# Altium PCB GreenHouseController.PcbDoc
Units mil, origin at the board's own origin, x right, y up, seen from the top; angles counter-clockwise.
Board outline 6000 x 4000 mil, 2 copper layers (Top Layer, Bottom Layer); 72 components, 50 nets, 229 pads, 0 vias.
Unrouted connection lines stored in the file: 146.
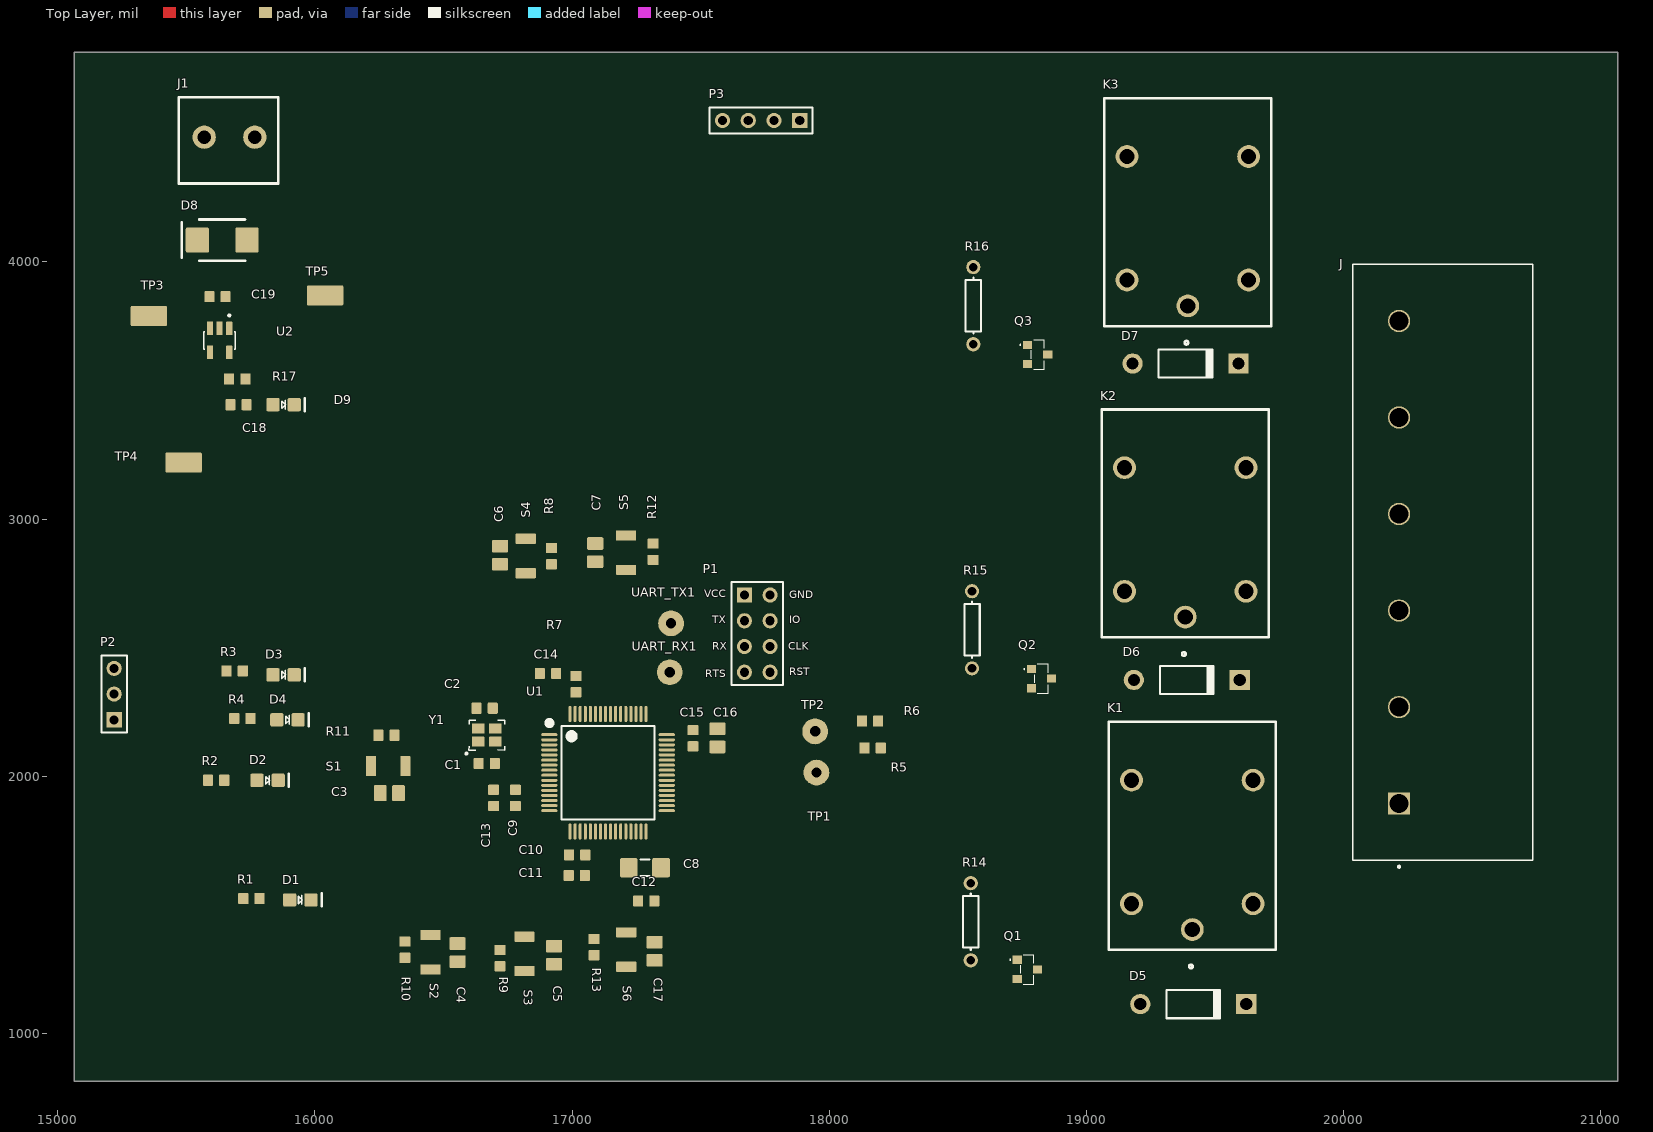
[diagram p0: Top Layer view]
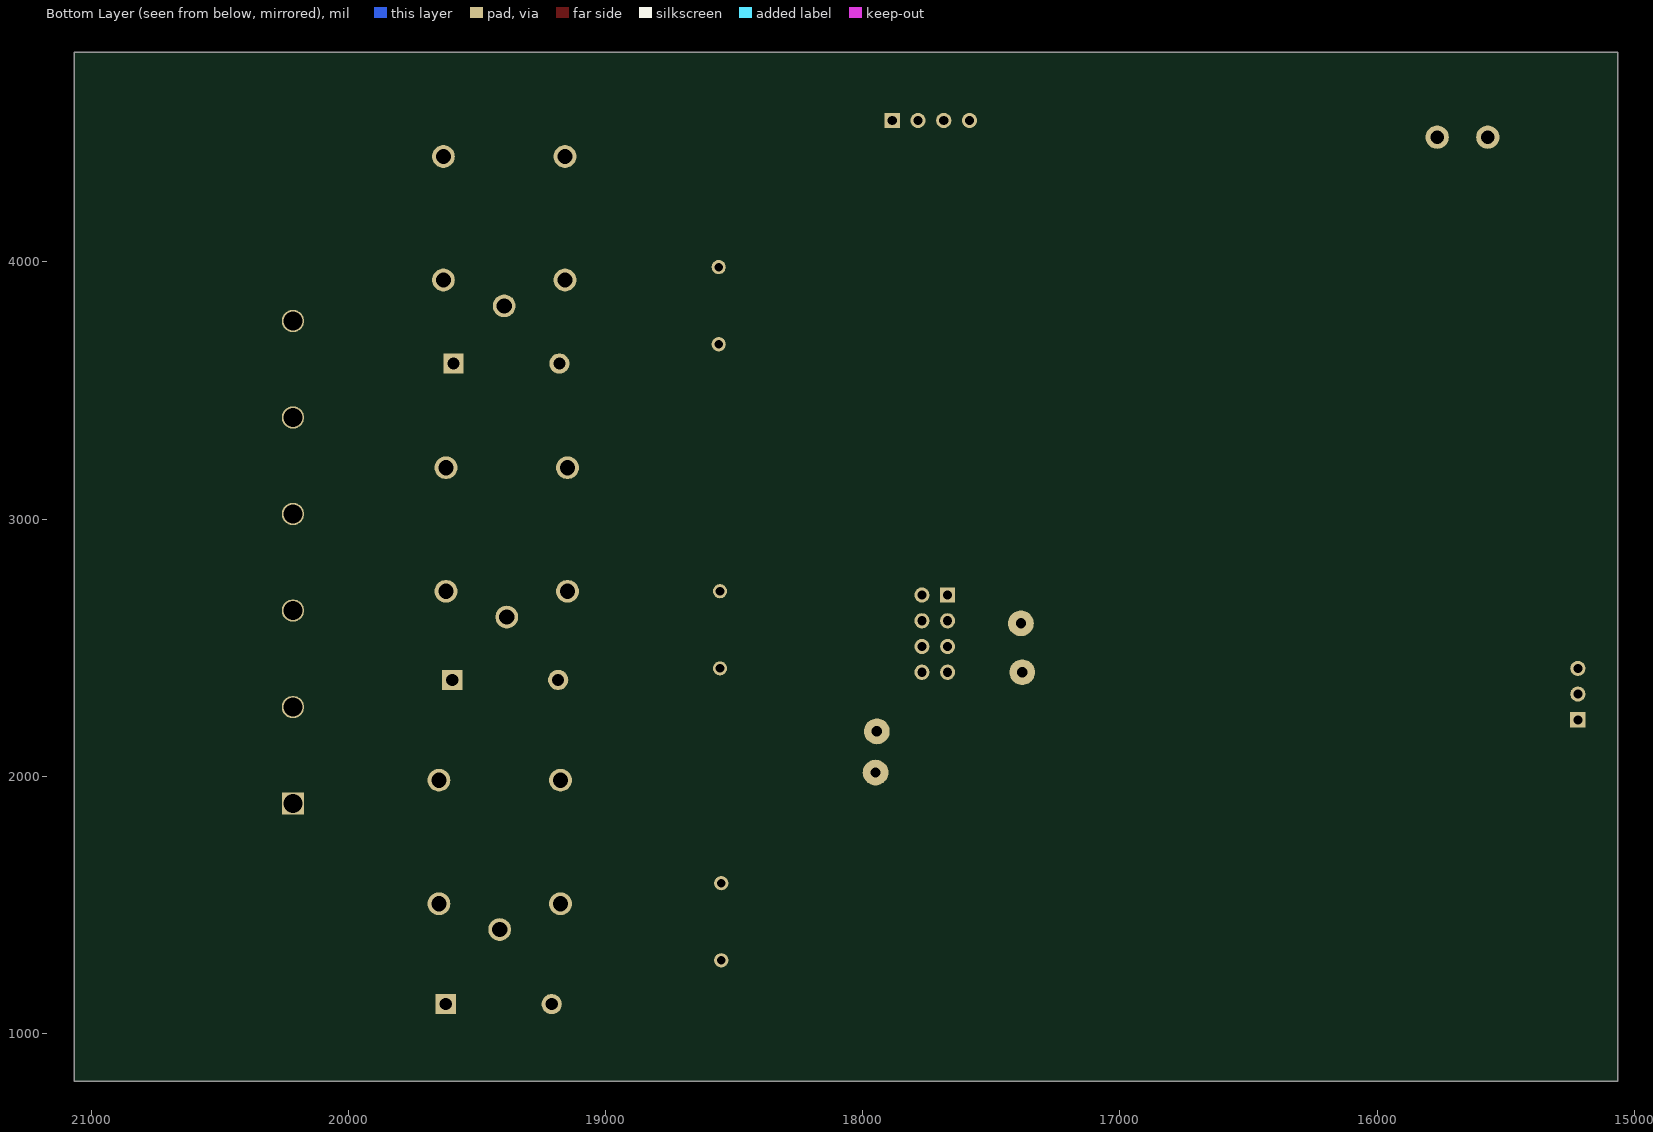
[diagram p1: Bottom Layer view, seen from below]

## Layer stack, top to bottom
Top Solder: solder mask 0.4, Solder Resist, Dk 3.5
Top Layer: signal copper 1.4
Dielectric 1: dielectric 12.6, FR-4, Dk 4.8
Bottom Layer: signal copper 1.4
Bottom Solder: solder mask 0.4, Solder Resist, Dk 3.5

## Board outline
15065,815 21065,815 21065,4815 15065,4815

## Design rules (kind name [scope] priority, off if disabled: settings)
Clearance [All] p1: gap=10 ignorepadtopadclearanceinfootprint=FALSE except(0: Arc-Hole Track-Hole SMDPad-Hole THPad-Hole Via-Hole Fill-Hole Poly-Hole Region-Hole Text-Hole)
PolygonConnect [All] p1: connectstyle=Relief reliefconductorwidth=10 reliefentries=4 polygonreliefangle="90 Angle" airgapwidth=10
RoomDefinition peripherals [InComponentClass('peripherals')] p1: confinementstyle=ConfineIn formatcopy=TRUE lockcomponents=FALSE outline 0,0 2000,0 2000,1000 0,1000
RoomDefinition MCU [InComponentClass('MCU')] p2: confinementstyle=ConfineIn formatcopy=TRUE lockcomponents=FALSE outline 0,0 2000,0 2000,1000 0,1000
RoutingVias [All] p1: holewidth=28 width=50 viastyle="Through Hole" minholewidth=28 minwidth=50 maxholewidth=28 maxwidth=50
SolderMaskExpansion [All] p1: expansion=4 istentingtop=FALSE
Width [All] p1: maxlimit=10 minlimit=10 preferedwidth=10
30 further rules are at their usual default settings.

## Classes and differential pairs
component class PowerAndServo: C18 C19 D8 D9 J1 P2 P3 R17 TP3 TP4 TP5 U2
component class peripherals: D5 D6 D7 J K1 K2 K3 Q1 Q2 Q3 R14 R15 R16
component class MCU: C1 C2 C3 C4 C5 C6 C7 C8 C9 C10 C11 C12 C13 C14 C15 C16 C17 D1 D2 D3 D4 P1 R1 R2 R3 R4 R5 R6 R7 R8 R9 R10 R11 R12 R13 S1 S2 S3 S4 S5 S6 TP1 TP2 U1 UART_RX1 UART_TX1 Y1

## Components (designator, comment, footprint, x,y, rotation, side; value= is the part's Value field where it differs from the comment)
C1 "CAP_14pF_50V_0603" CAP0603 16668.5,2050 r180 top value=14pF
C2 "50v" CAP0603 16660,2265 r0 top value=14pF
C3 "CAP_1uF_16V_0805" CAP2012 16290,1935 r0 top value=1μF
C4 "CAP_1uF_16V_0805" CAP2012 16555,1315 r90 top value=1μF
C5 "CAP_1uF_16V_0805" CAP2012 16930,1305 r90 top value=1μF
C6 "CAP_1uF_16V_0805" CAP2012 16720,2860 r270 top value=1μF
C7 "CAP_1uF_16V_0805" CAP2012 17090,2870 r270 top value=1μF
C8 "CAP_4.7uF_50V_1206" CAP1206 17282.99,1645 r180 top
C9 "CAP_0.1uF_16V_0603" CAP0603 16780,1916.5 r270 top value=0.1μF
C10 "CAP_1uF_16V_0603" CAP0603 17020,1695 r0 top value=1μF
C11 "CAP_0.1uF_16V_0603" CAP0603 17018.5,1615 r0 top value=0.1μF
C12 "CAP_0.1uF_16V_0603" CAP0603 17288.5,1515.65 r0 top value=0.1μF
C13 "CAP_0.1uF_16V_0603" CAP0603 16695,1916.5 r270 top value=0.1μF
C14 "CAP_0.1uF_16V_0603" CAP0603 16906.5,2400 r180 top value=0.1μF
C15 "CAP_4.7uF_16V_0603" CAP0603 17470,2148.5 r90 top value=4.7μF
C16 "CAP_10nF_16V_0805" CAP2012 17565,2149.76 r90 top
C17 "CAP_1uF_16V_0805" CAP2012 17320.65,1320.24 r90 top value=1μF
C18 "CAP_1uF_50V_0603" CAP0603 15703.5,3445 r180 top value=1μF
C19 "CAP_1uF_50V_0603" CAP0603 15621.5,3865 r180 top value=1μF
D1 "LED_GREEN" LED_0805_GREEN 15943.66,1520 r0 top
D2 "LED_GREEN" LED_0805_GREEN 15816.34,1985 r0 top
D3 "LED_GREEN" LED_0805_GREEN 15878.66,2395 r0 top
D4 "LED_GREEN" LED_0805_GREEN 15893.66,2220 r0 top
D5 "Diode 1N4007" DO-41 19415,1115 r0 top
D6 "Diode 1N4007" DO-41 19390,2375 r0 top
D7 "Diode 1N4007" DO-41 19385,3605 r0 top
D8 "TVS_DIODE_UNIDIR_5V" SMBJ5.0A 15640,4085 r0 top
D9 "DIO_LED_G" LED_0805_GREEN 15878.66,3445 r0 top
J "6PCV-06-006" TE_9-1437652-5 20215,1894.41 r90 top
J1 "CON_2M_TERM" 1935161 15668.43,4485 r0 top
K1 "G5LE-14_DC5" G5LE-1A 19736.02,1325.87 r90 top
K2 "G5LE-14_DC5" G5LE-1A 19708.58,2540.55 r90 top
K3 "G5LE-14_DC5" G5LE-1A 19718.58,3750.55 r90 top
P1 "HEADER 4X2" HEADER_2X4 17670,2705 r270 top
P2 "Header 3" HDR1X3 15220,2220 r90 top
P3 "Header 4" HDR1X4 17885,4550 r180 top
Q1 "MMBT3904-TP" SI2305TP 18770,1250 r270 top
Q2 "MMBT3904-TP" SI2305TP 18825,2380 r270 top
Q3 "MMBT3904-TP" SI2305TP 18810,3640 r270 top
R1 "RES_120Ω_0603_5%" RESC0603 15722.01,1525 r0 top value=120Ω
R2 "RES_120Ω_0603_5%" RESC0603 15585,1985 r0 top value=120Ω
R3 "RES_120Ω_0603_5%" RESC0603 15657.01,2410 r0 top value=120Ω
R4 "RES_120Ω_0603_5%" RESC0603 15687.01,2225 r0 top value=120Ω
R5 "RES_1kΩ_0603_5%" RESC0603 18137.01,2110 r0 top value=1kΩ
R6 "RES_1kΩ_0603_5%" RESC0603 18127.01,2215 r0 top value=1kΩ
R7 "RES_1kΩ_0603_5%" RESC0603 17015,2327.01 r90 top value=1kΩ
R8 "RES_10kΩ_0603_5%" RESC0603 16920,2825 r90 top value=10kΩ
R9 "RES_10kΩ_0603_5%" RESC0603 16720,1325 r270 top value=10kΩ
R10 "RES_10kΩ_0603_5%" RESC0603 16350,1357.99 r270 top value=10kΩ
R11 "RES_10kΩ_0603_5%" RESC0603 16310,2160 r180 top value=10kΩ
R12 "RES_10kΩ_0603_5%" RESC0603 17315,2842.01 r90 top value=10kΩ
R13 "RES_10kΩ_0603_5%" RESC0603 17085.65,1367.99 r270 top value=10kΩ
R14 "Res1" AXIAL-0.3 18550,1435 r270 top value=1K
R15 "Res1" AXIAL-0.3 18555,2570 r270 top value=1K
R16 "Res1" AXIAL-0.3 18560,3830 r270 top value=1K
R17 "RES_120Ω_0603_5%_HP" RESC0603 15730,3545 r180 top
S1 "SW_TACTILE" B3U-1000P 16285,2040 r180 top
S2 "SW_TACTILE" B3U-1000P 16450,1316.93 r270 top
S3 "SW_TACTILE" B3U-1000P 16815,1310 r270 top
S4 "SW_TACTILE" B3U-1000P 16820,2856.93 r90 top
S5 "SW_TACTILE" B3U-1000P 17210,2870 r90 top
S6 "SW_TACTILE" B3U-1000P 17210.65,1326.93 r270 top
TP1 "TESTPOINT_LOOP" TESTPOINT_LOOP 17950,2015 r0 top
TP2 "TESTPOINT_LOOP" TESTPOINT_LOOP 17945,2175 r0 top
TP3 "TESTPOINT_SMD_LOOP" S1751-46R 15355,3790 r0 top
TP4 "TESTPOINT_SMD_LOOP" S1751-46R 15490,3220 r0 top
TP5 "TESTPOINT_SMD_LOOP" S1751-46R 16040,3870 r0 top
U1 "STM32F446RET6" STM-LQFP64_L 17140,2014.43 r0 top
U2 "LDO_3.3V_600mA" SOT95P285X140-5N 15630,3695 r270 top
UART_RX1 "TESTPOINT_LOOP" TESTPOINT_LOOP 17380,2405 r90 top
UART_TX1 "TESTPOINT_LOOP" TESTPOINT_LOOP 17385,2595 r90 top
Y1 "CRYSTAL_25MHZ" SOIC254P1016X440-4N 16668.46,2160.59 r0 top

## Footprints (in the part's own frame and the unit in brackets; to place one, negate y for a bottom-side part, rotate by r counter-clockwise, add the part's x,y. Pads: shape width x height; smd on the part's side, far side on the other; paste and mask are expansions set on the pad)
1935161 [mm] "TERM BLK 2POS SIDE ENTRY 5MM PCB"
  round 2.3 hole 1.325: 1(-2.5,0) 2(2.5,0)
  silkscreen extent -5.01,-4.57 4.83,3.94, body extent -5.01,-5.06 5.39,3.94, height 11.41
AXIAL-0.3 [mm] "Axial Device, Thru-Hole; 2 Leads; 0.3 in Pin Spacing"
  round 1.4 hole 0.85: 1(-3.81,0) 2(3.81,0)
  silkscreen extent -2.77,-0.76 2.77,0.76
B3U-1000P [mm] "TACTILE SWITCH GREY"
  rrect15% 1x2 smd: 1(-1.7,0) 2(1.7,0)
  body extent -2,-1.25 2,1.25, height 1.6
CAP0603 [mm]
  rrect20% 1x1.1 smd: 1(-0.8,0) 2(0.8,0)
  body extent -0.87,-0.48 0.88,0.48, height 0.87
CAP1206 [mm] "Chip Capacitor, Body 3.2x1.6mm, Height 0.55mm, IPC Medium Density"
  rrect20% 1.75x1.9 smd: 1(-1.6,0) 2(1.6,0)
  silkscreen extent -0.45,-0.8 0.45,0.8, body extent -1.7,-0.9 1.7,0.9, height 0.88
CAP2012 [mm]
  rrect20% 1.25x1.6 smd: 1(-0.895,0) 2(0.895,0)
  body extent -1.1,-0.7 1.1,0.75, height 1.41
DO-41 [mm] "Diode, Axial; Body 5.2 x 2.7 mm (LxDia. max), Lead Dia. 0.86 mm (max)"
  round 2 hole 1.2: 1(-5.23,0)
  rect 2x2 hole 1.2: 2(5.23,0)
  silkscreen extent -2.65,-1.41 2.75,1.4
G5LE-1A [mm]
  round 2.25 hole 1.5: 1(2,8.25) 2(4.55,2.25) 3(16.75,2.25) 4(16.75,14.25) 5(4.55,14.25)
  silkscreen extent -1.81,0 22.5,16.5
HDR1X3 [mm] "Connector; Header; 3 Position"
  rect 1.5x1.5 hole 0.9: 1(0,0)
  round 1.5 hole 0.9: 2(2.54,0) 3(5.08,0)
  silkscreen extent -1.27,-1.27 6.35,1.27
HDR1X4 [mm] "Connector; Header; 4 Position"
  rect 1.5x1.5 hole 0.9: 1(0,0)
  round 1.5 hole 0.9: 2(2.54,0) 3(5.08,0) 4(7.62,0)
  silkscreen extent -1.27,-1.27 8.89,1.27
HEADER_2X4 [mm]
  rect 1.5x1.5 hole 0.9: 1(0,0)
  round 1.5 hole 0.9: 2(2.54,0) 3(5.08,0) 4(7.62,0) 5(0,2.54) 6(2.54,2.54) 7(5.08,2.54) 8(7.62,2.54)
  silkscreen extent -1.27,-1.27 8.89,3.81, body extent -1.36,-1.32 8.8,3.67, height 8.54
LED_0805_GREEN [mm] "SMD, 2-Leads, Body 2x1.25mm"
  rrect20% 1.3x1.3 smd: 1(-1.05,0) 2(1.05,0)
  silkscreen extent -0.18,-0.64 2.11,0.64, body extent -1,-0.62 1,0.63, height 1.12
RESC0603 [mm] "Chip Resistor, Body 1.6x0.8mm, IPC Medium Density"
  rrect15% 1x1.1 smd: 1(0,0) 2(1.6,0)
  body extent 0,-0.4 1.6,0.4, height 0.46
S1751-46R [mm] "SMD LOOP TESTPOINT"
  rrect15% 3.6x2 smd: 1(0,0)
  body extent -1.63,-0.85 1.62,0.8, height 2.01
SI2305TP [mm]
  rect 0.8x0.9 smd: 1(-0.95,-1) 2(0.95,-1) 3(0,1)
  silkscreen extent -1.46,-1.75 1.46,0.65
SMBJ5.0A [mm] "9.2V Clamp 65.3A Ipp Tvs Diode Surface Mount SMB (DO-214AA)"
  rrect15% 2.3x2.5 smd: 1(-2.45,0) 2(2.45,0)
  silkscreen extent -4,-2.03 2.25,2.03, body extent -2.7,-1.8 2.7,1.8, height 2.27
SOIC254P1016X440-4N [mm]
  rrect15% 1.25x1 smd: 1(-0.85,-0.65) 2(0.85,-0.65) 3(0.85,0.65) 4(-0.85,0.65)
  silkscreen extent -2.11,-1.93 1.75,1.47, body extent -1.24,-0.85 1.24,0.85, height 0.56
SOT95P285X140-5N [mm] "AP2112K-3.3TRG1 LDO"
  rrect15% 1.35x0.6 smd: 1(-1.185,0.95) 2(-1.185,0) 3(-1.185,-0.95) 4(1.185,-0.95) 5(1.185,0.95)
  silkscreen extent -2.57,-1.55 0.85,1.55, body extent -1.4,-1.5 1.4,1.5, height 1.4
STM-LQFP64_L [mm] "QFP, 64-Leads, Body 10x10mm, Pitch 0.5mm, IPC High Density"
  oval 1.6x0.3 smd: 1(-5.8,3.75) 2(-5.8,3.25) 3(-5.8,2.75) 4(-5.8,2.25) 5(-5.8,1.75) 6(-5.8,1.25) 7(-5.8,0.75) 8(-5.8,0.25) 9(-5.8,-0.25) 10(-5.8,-0.75) 11(-5.8,-1.25) 12(-5.8,-1.75) 13(-5.8,-2.25) 14(-5.8,-2.75) 15(-5.8,-3.25) 16(-5.8,-3.75) 33(5.8,-3.75) 34(5.8,-3.25) 35(5.8,-2.75) 36(5.8,-2.25) 37(5.8,-1.75) 38(5.8,-1.25) 39(5.8,-0.75) 40(5.8,-0.25) 41(5.8,0.25) 42(5.8,0.75) 43(5.8,1.25) 44(5.8,1.75) 45(5.8,2.25) 46(5.8,2.75) 47(5.8,3.25) 48(5.8,3.75)
  oval 0.3x1.6 smd: 17(-3.75,-5.8) 18(-3.25,-5.8) 19(-2.75,-5.8) 20(-2.25,-5.8) 21(-1.75,-5.8) 22(-1.25,-5.8) 23(-0.75,-5.8) 24(-0.25,-5.8) 25(0.25,-5.8) 26(0.75,-5.8) 27(1.25,-5.8) 28(1.75,-5.8) 29(2.25,-5.8) 30(2.75,-5.8) 31(3.25,-5.8) 32(3.75,-5.8) 49(3.75,5.8) 50(3.25,5.8) 51(2.75,5.8) 52(2.25,5.8) 53(1.75,5.8) 54(1.25,5.8) 55(0.75,5.8) 56(0.25,5.8) 57(-0.25,5.8) 58(-0.75,5.8) 59(-1.25,5.8) 60(-1.75,5.8) 61(-2.25,5.8) 62(-2.75,5.8) 63(-3.25,5.8) 64(-3.75,5.8)
  silkscreen extent -5.92,-4.6 4.6,5.02, body extent -5.98,-6 6.02,6, height 1.56
TE_9-1437652-5 [mm]
  rect 2.204x2.204 hole 1.854: 1(0,0)
  round 2.204 hole 1.854: 2(9.53,0) 3(19.06,0) 4(28.59,0) 5(38.12,0) 6(47.65,0)
  silkscreen extent -6.34,-13.21 53.24,4.57
TESTPOINT_LOOP [mm]
  round 2.54 hole 1.02: 1(0,0)
  body extent -1.27,-1.27 1.27,1.27, height 4.57

## Part data
C1: "CAP CER 14PF 50V C0G/NP0 0603", Dielectric=C0G, Manufacturer 1=Samsung, Manufacturer Part Number 1=CL10C140JB8NNNC, Package/Footprint=0603, Supplier Part Number 1=1276-2187-1-ND, Voltage Rating=50V, Mounting Type=SMD, Supplier 1=Digi-Key
C2: library part CAP_14pF_50V_0603, "CAP CER 14PF 50V C0G/NP0 0603", Dielectric=C0G, Manufacturer 1=Samsung, Manufacturer Part Number 1=CL10C140JB8NNNC, Package/Footprint=0603, Supplier Part Number 1=1276-2187-1-ND, Voltage Rating=50V, Mounting Type=SMD, Supplier 1=Digi-Key
C3 C4 C5 C6 C7 C17: "CAP CER 1UF 16V X7R 0805", Dielectric=X7R, Manufacturer 1=Yageo, Manufacturer Part Number 1=CC0805KKX7R7BB105, Package/Footprint=0805, Supplier Part Number 1=311-1365-1-ND, Voltage Rating=16V, Mounting Type=SMD, Supplier 1=Digi-Key
C8: "CAP CER 4.7UF 50V X7R 1206", Dielectric=X7R, Manufacturer 1=Murata, Manufacturer Part Number 1=GRM31CR71H475KA12L, Package/Footprint=1206, Supplier Part Number 1=490-6521-1-ND, Mounting Type=SMD, Supplier 1=Digi-Key
C9 C11 C12 C13 C14: "CAP CER 0.1UF 16V X7R 0603", Dielectric=X7R, Manufacturer 1=Yageo, Manufacturer Part Number 1=CC0603KRX7R7BB104, Package/Footprint=0603, Supplier Part Number 1=311-1088-1-ND, Voltage Rating=16V, Supplier 1=Digi-Key
C10: "CAP CER 1UF 16V Y5V 0603", Dielectric=Y5V, Manufacturer 1=Yageo, Manufacturer Part Number 1=CC0603ZRY5V7BB105, Package/Footprint=0603, Supplier Part Number 1=311-1372-1-ND, Voltage Rating=16V, Mounting Type=SMD, Supplier 1=Digi-Key
C15: "CAP CER 4.7UF 16V X6S 0603", Dielectric=X6S, Manufacturer 1="Murata Electronics", Manufacturer Part Number 1=GRM188C81C475KE11D, Package/Footprint=0603, Supplier Part Number 1=490-13362-1-ND, Voltage Rating=16V, Mounting Type=SMD, Supplier 1=Digi-Key
C16: "CAP CER 10000PF 16V X7R 0805", Manufacturer 1=Yageo, Manufacturer Part Number 1=AC0805KRX7R7BB103, Supplier Part Number 1=311-3161-1-ND, Voltage Rating=16V, Supplier 1=Digi-Key
C18 C19: "CAP CER 1UF 50V X6S 0603", Dielectric=X6S, Manufacturer 1="TDK Corporation", Manufacturer Part Number 1=C1608X6S1H105K080AC, Supplier Part Number 1=445-7424-1-ND, Voltage Rating=50V, Supplier 1=Digi-Key
D1 D2 D3 D4 D9: "LED GREEN DIFFUSED 0805 SMD", Forward Voltage Drop=2.2V, Manufacturer 1=OSRAM, Manufacturer Part Number 1="LG R971-KN-1", Package/Footprint=0805, Supplier Part Number 1=475-1410-1-ND, Mounting Type=SMD, Supplier 1=Digi-Key
D5 D6 D7: "1 Amp General Purpose Rectifier", Code_JEDEC=DO-204-AL, ComponentLink1Description="Manufacturer Link", ComponentLink1URL=http://www.fairchildsemi.com/, ComponentLink2Description=Datasheet, ComponentLink2URL=http://www.fairchildsemi.com/ds/1N%2F1N4001.pdf, DatasheetVersion=1998, LatestRevisionDate=17-Jul-2002, LatestRevisionNote="Re-released for DXP Platform.", PackageDescription="Diode, Axial; Body 5.2 x 2.7 mm (LxDia. max), Lead Dia. 0.86 mm (max)", PackageReference=DO-41, PackageVersion=Aug-1999, Published=8-Jun-2000, Publisher="Altium Limited"
D8: "TVS DIODE 5V 9.2V SMB", Manufacturer 1=Bourns, Manufacturer Part Number 1=SMBJ5.0A, Package/Footprint=SMB, Supplier Part Number 1=SMBJ5.0ABCT-ND, Mounting Type=SMD, Supplier 1=Digi-Key
J: "Buchanan 6 Position 9.53 mm Pitch Single Row 12-22 AWG Tri-Barrier Strip", Package=None, Availability=Unavailable, MF="TE Connectivity", MP=6PCV-06-006, Price=None, SnapEDA_Link=https://www.snapeda.com/parts/6PCV-06-006/TE%20Connectivity%20AMP%20Connectors/view-part/2782422/?ref=snap, TE_purchase_URL=https://www.te.com/usa-en/product-9-1437652-5.html?te_bu=Cor&te_type=disp&te_campaign=seda_glo_cor-seda-global-disp-prtnr-fy19-seda-model-bom-cta_sma-317_1&elqCampaignId=32493
J1: "TERM BLK 2POS SIDE ENTRY 5MM", Current=18A, Manufacturer 1="Phoenix Contact", Manufacturer Part Number 1=1935161, Max Current Rating=16A, Package/Footprint=SMD, Supplier Part Number 1=277-1667-ND, Voltage=300V, Mounting Type=TH, Supplier 1=Digi-Key
K1 K2 K3: "Relay or Contactor", Manufacturer_Name="Omron Electronics", Manufacturer_Part_Number="G5LE-14 DC5", Datasheet Link=http://omronfs.omron.com/en_US/ecb/products/pdf/en-g5le.pdf
P1: "CONN HEADER VERT 8POS 2.54MM", Manufacturer 1="Harwin Inc.", Manufacturer Part Number 1=M20-9980445, Supplier Part Number 1=952-2122-ND, Supplier 1=Digi-Key
P2: "Header, 3-Pin", LatestRevisionDate=17-Jul-2002, LatestRevisionNote="Re-released for DXP Platform.", Publisher="Altium Limited"
P3: "Header, 4-Pin", LatestRevisionDate=17-Jul-2002, LatestRevisionNote="Re-released for DXP Platform.", Publisher="Altium Limited"
Q1 Q2 Q3: "Transistor BJT NPN", Manufacturer_Name="Micro Commercial Components (MCC)", Mouser Part Number=833-MMBT3904-TP, Arrow Part Number=MMBT3904-TP, Arrow Price/Stock=https://www.arrow.com/en/products/mmbt3904-tp/micro-commercial-components, Datasheet Link=https://componentsearchengine.com/Datasheets/1/MMBT3904-TP.pdf, Manufacturer_Part_Number=MMBT3904-TP, Mouser Price/Stock=https://www.mouser.co.uk/ProductDetail/Micro-Commercial-Components-MCC/MMBT3904-TP/?qs=KFo7JewZbUHicjDjIayULQ%3D%3D
R1 R2 R3 R4: "RES 120 OHM 5% 1/10W 0603", Manufacturer 1=Yageo, Manufacturer Part Number 1=RC0603JR-07120RL, Package/Footprint=0603, Supplier Part Number 1=311-120GRCT-ND, Mounting Type=SMD, Supplier 1=Digi-Key
R5 R6 R7: "RES 1K OHM 5% 1/10W 0603", Manufacturer 1=Yageo, Manufacturer Part Number 1=RC0603JR-071KL, Package/Footprint=0603, Supplier Part Number 1=311-1.0KGRCT-ND, Mounting Type=SMD, Supplier 1=Digi-Key
R8 R9 R10 R11 R12 R13: "RES 10K OHM 5% 1/10W 0603", Manufacturer 1=Yageo, Manufacturer Part Number 1=RC0603JR-0710KL, Package/Footprint=0603, Supplier Part Number 1=311-10KGRCT-ND, Mounting Type=SMD, Supplier 1=Digi-Key
R14 R15 R16: "Resistor", LatestRevisionDate=17-Jul-2002, LatestRevisionNote="Re-released for DXP Platform.", PackageDescription="Axial Device, Thru-Hole; 2 Leads; 0.3 in Pin Spacing", PackageReference=AXIAL-0.3, Published=8-Jun-2000, Publisher="Altium Limited"
R17: "RES 120 OHM 5% 1/4W 0603", Manufacturer 1=Rohm, Manufacturer Part Number 1=ESR03EZPJ121, Package/Footprint=0603, Supplier Part Number 1=RHM120DCT-ND, Mounting Type=SMD, Supplier 1=Digi-Key
S1 S2 S3 S4 S5 S6: "Tactile Switch (Grey)", Manufacturer 1="Omron Electronics Inc-EMC Div", Manufacturer Part Number 1=B3U-1000P, Supplier Part Number 1=SW1020CT-ND, Mount="Surface Mount", Supplier 1=Digi-Key
TP1 TP2 UART_RX1 UART_TX1: "TESTPOINT THRUHOLE", Manufacturer 1="Keystone Electronics", Manufacturer Part Number 1=5002, Package/Footprint=TH, Supplier Part Number 1=36-5002-ND, Mounting Type=TH, Supplier 1=Digi-Key
TP3 TP4 TP5: "TESTPOINT SMD", Manufacturer 1=Harwin, Manufacturer Part Number 1=S1751-46R, Package/Footprint=SMD, Supplier Part Number 1=952-1478-1-ND, Mounting Type=SMD, Supplier 1=Digi-Key
U1: library part MCU_STM32F446RET6, "ARM Cortex-M4 32-bit MCU+FPU, 512 KB Flash, 128 KB Internal RAM, 50 I/Os, 64-Pin LQFP, -40 to 85 degC, Tray", I/Os (High Current)=50, Operating Frequency(F) (Processor speed) (MHz)=180, Package Description=LQFP64, Package Reference="64-Pin Low-profile Quad Flat Package, Body 10 x 10 mm, Pitch 0.5 mm", Supplier Part Number 1=497-15376-ND, Supply Voltage(Vcc) min (V)=1.7, ComponentLink1Description="Manufacturer URL", ComponentLink1URL=http://www.st.com/, ComponentLink2Description=Datasheet, ComponentLink2URL=http://www.st.com/st-web-ui/static/active/en/resource/technical/document/datasheet/DM00141306.pdf, Core="ARM Cortex-M4", D/A Converter=2, DatasheetVersion="Rev. 6", FLASH Size (Prog) (kB)=512, Internal RAM Size (kB)=128, Mounting Technology="Surface Mount", Packing=Tray, Supplier 1=Digi-Key
U2: "IC REG LINEAR 3.3V 600MA SOT25", Input Voltage (Max)=6V, LCSC Part #=C51118, Manufacturer 1="Diodes Incorporated", Manufacturer Part Number 1=AP2112K-3.3TRG1, Operating Temperature="-40°C - 85°C", Output Current=600mA, Output Voltage (Fixed)=3.3V, Package/Footprint=SOT-25, Supplier Part Number 1=AP2112K-3.3TRG1DICT-ND, Voltage Dropout (Max)=0.4V, Mounting Type=SMD, Supplier 1=Digi-Key
Y1: "CRYSTAL 25.0000MHZ 12PF SMD", Frequency=25MHz, Load Capacitance=12pF, Manufacturer 1="Kyocera AVX", Manufacturer Part Number 1=CX2520DB25000H0FLJC1, Package/Footprint=SMD, Supplier Part Number 1=1253-1724-1-ND, Mounting Type=SMD, Supplier 1=Digi-Key

## Nets (pads, with @x,y where several pads share a name; then routed paths per layer and width w, separated by ;. In a path a pad name is that pad's centre, name@x,y a point inside that pad or via, vN(x,y) a via of type N, cw(c..) or ccw(c..) an arc to the next point about the centre after c; other vN are vias at no path point)
3V3: C9.2 C10.2 C11.2 C12.2 C13.2 C14.2 C15.2 C16.2 C18.2 P1.1 P2.2 P3.1 R5.2 R6.2 R8.2 R9.2 R10.2 R11.2 R12.2 R13.2 R17.2 TP4.1 U1.1 U1.13 U1.19 U1.32 U1.48 U1.64 U2.5
5V: C19.2 D5.2 D6.2 D7.2 D8.1 J1.1 K1.2 K2.2 K3.2 TP3.1 U2.1 U2.3
Fan_high: J.5 K3.1
Fan_low: J.6 K3.4
GND: C1.1 C2.1 C3.1 C8.1 C9.1 C10.1 C11.1 C12.1 C13.1 C14.1 C15.1 C16.1 C18.1 C19.1 D1.2 D2.2 D3.2 D4.2 D8.2 D9.2 J1.2 P1.5 P2.3 P3.4 Q1.2 Q2.2 Q3.2 R7.2 S1.2 TP5.1 U1.12 U1.18 U1.31 U1.47 U1.63 U2.2 Y1.2
Heater_high: J.1 K1.1
Heater_low: J.2 K1.4
LED_1: R1.1 U1.8
LED_2: R2.1 U1.9
LED_3: R3.1 U1.10
LED_4: R4.1 U1.11
Lights_high: J.3 K2.1
Lights_low: J.4 K2.4
NetC1_2: C1.2 U1.6 Y1.1
NetC2_2: C2.2 U1.5 Y1.3
NetC4_1: C4.1 S2.2
NetC4_2: C4.2 R10.1 S2.1 U1.26
NetC5_1: C5.1 S3.2
NetC5_2: C5.2 R9.1 S3.1 U1.27
NetC6_1: C6.1 S4.2
NetC6_2: C6.2 R8.1 S4.1 U1.57
NetC7_1: C7.1 S5.2
NetC7_2: C7.2 R12.1 S5.1 U1.53
NetC8_2: C8.2 U1.30
NetC17_1: C17.1 S6.2
NetC17_2: C17.2 R13.1 S6.1 U1.28
NetD1_1: D1.1 R1.2
NetD2_1: D2.1 R2.2
NetD3_1: D3.1 R3.2
NetD4_1: D4.1 R4.2
NetD5_1: D5.1 K1.5 Q1.3
NetD6_1: D6.1 K2.5 Q2.3
NetD7_1: D7.1 K3.5 Q3.3
NetD9_1: D9.1 R17.1
NetP2_1: P2.1 U1.29
NetP3_2: P3.2 R5.1 TP1.1 U1.40
NetP3_3: P3.3 R6.1 TP2.1 U1.41
NetQ1_1: Q1.1 R14.2
NetQ2_1: Q2.1 R15.2
NetQ3_1: Q3.1 R16.2
NetR7_1: R7.1 U1.60
NetR14_1: R14.1 U1.16
NetR15_1: R15.1 U1.17
NetR16_1: R16.1 U1.20
RESET_n: C3.2 P1.8 R11.1 S1.1 U1.7
SWD_CLK: P1.7 U1.49
SWD_IO: P1.6 U1.46
UART_RTS: P1.4 U1.50
UART_RX: P1.3 U1.15 UART_RX1.1
UART_TX: P1.2 U1.14 UART_TX1.1
pads on no net: K1.3 K2.3 K3.3 U1.2 U1.3 U1.4 U1.21 U1.22 U1.23 U1.24 U1.25 U1.33 U1.34 U1.35 U1.36 U1.37 U1.38 U1.39 U1.42 U1.43 U1.44 U1.45 U1.51 U1.52 U1.54 U1.55 U1.56 U1.58 U1.59 U1.61 U1.62 U2.4 Y1.4

## Text inside footprints (layer, text, board x,y; h text height)
P1: Top Overlay "TX" at 17545.91,2594.76 h30; Top Overlay "RX" at 17545.91,2492.4 h30; Top Overlay "RTS" at 17517.28,2386.1 h30; Top Overlay "IO" at 17845.04,2594.76 h30; Top Overlay "CLK" at 17841.1,2492.4 h30; Top Overlay "RST" at 17845.04,2393.19 h30; Top Overlay "VCC" at 17514.33,2697.13 h30; Top Overlay "GND" at 17845.04,2693.19 h30